# Altium PCB BARRA_SEC_SECUNDARIA.PcbDoc
Units mm, origin at the board's own origin, x right, y up, seen from the top; angles counter-clockwise.
Board outline 195.08 x 54.85 mm, 2 copper layers (Top Layer, Bottom Layer); 8 components, 9 nets, 28 pads, 0 vias.
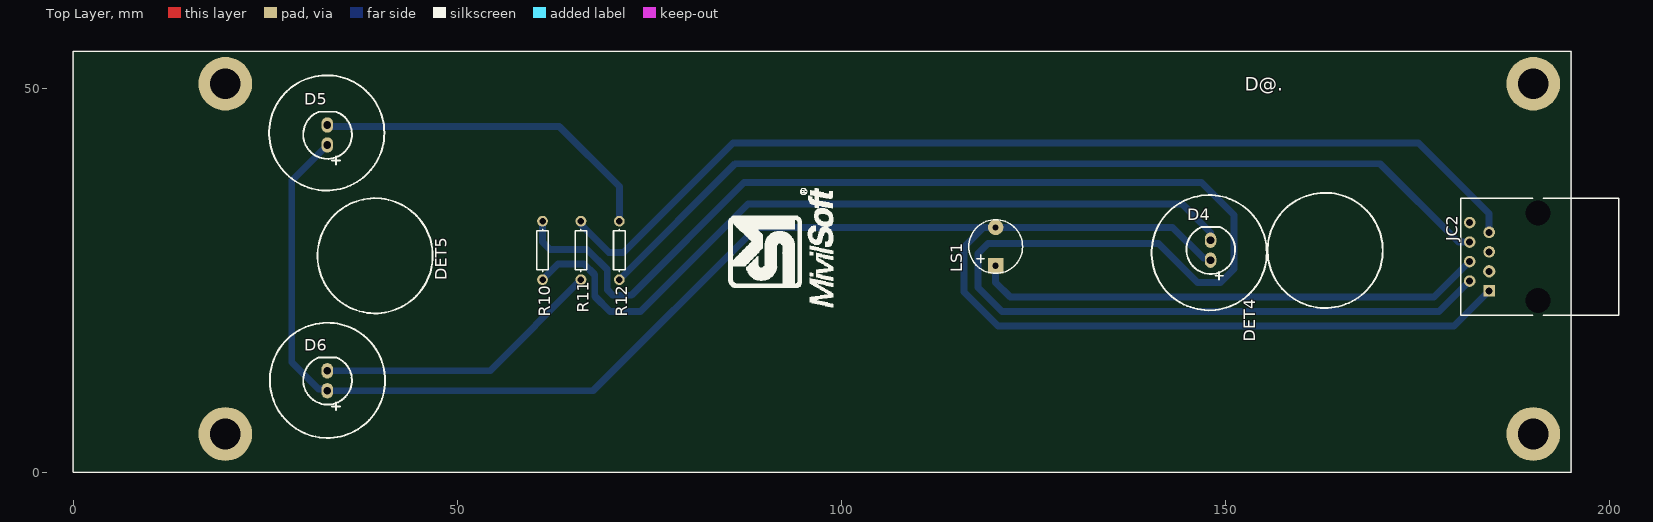
[diagram p0: Top Layer view]
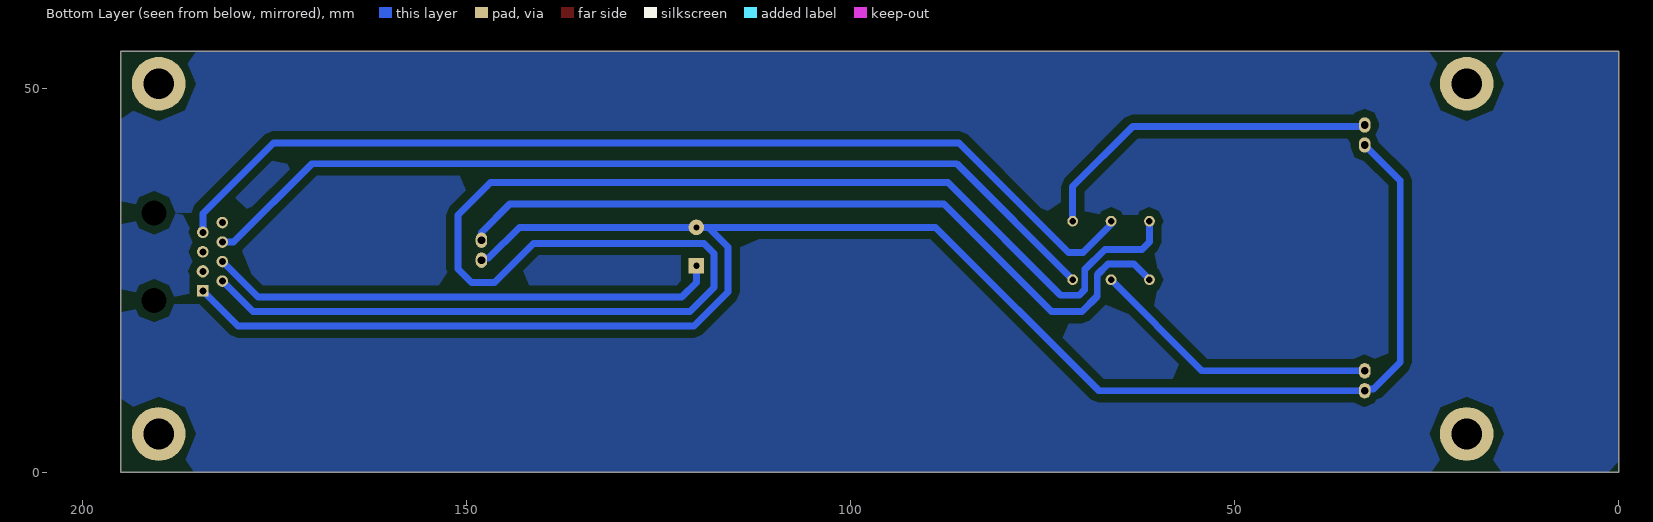
[diagram p1: Bottom Layer view, seen from below]

## Layer stack, top to bottom
Top Solder: solder mask 0.0102, Solder Resist, Dk 3.5
Top Layer: signal copper 0.0356
Dielectric 1: dielectric 0.32, FR-4, Dk 4.8
Bottom Layer: signal copper 0.0356
Bottom Solder: solder mask 0.0102, Solder Resist, Dk 3.5

## Board outline
0,0 195.075,0 195.075,54.846 0,54.846 0,25.896

## Design rules (kind name [scope] priority, off if disabled: settings)
Clearance "POLIGONO GND BOTTON" [(InNamedPolygon('GND BOTTON'))] p1: gap=1
Clearance [All] p2: gap=0.3
PolygonConnect [All] p1: connectstyle=Relief reliefconductorwidth=0.254 reliefentries=4 polygonreliefangle="90 Angle" airgapwidth=0.254
RoomDefinition barra_sec_secundaria [InComponentClass('barra_sec_secundaria')] p1: confinementstyle=ConfineIn formatcopy=TRUE lockcomponents=FALSE outline 0.225,25.975 11.578,25.975 11.578,0.046 195.125,0.046 195.125,54.896 0.225,54.896
RoutingLayers [All] p1: top layer_v5=FALSE bottom layer_v5=TRUE
RoutingVias [All] p1: holewidth=0.711 width=1.27 viastyle="Through Hole" minholewidth=0.711 minwidth=1.27 maxholewidth=0.711 maxwidth=1.27
SolderMaskExpansion [All] p1: expansion=0.102
Width [All] p1: maxlimit=1.5 minlimit=0.8 preferedwidth=0.9
28 further rules are at their usual default settings.

## Components (designator, comment, footprint, x,y, rotation, side; value= is the part's Value field where it differs from the comment)
D4 "LED1" "LED5MM RED" 148.125,28.896 r90 top
D5 "LED1" "LED5MM RED" 33.125,43.896 r90 top
D6 "LED1" "LED5MM RED" 33.125,11.896 r90 top
JC2 "RJ45" 15-43-6233 201.275,28.075 r90 top
LS1 "Speaker" C100UFA 120.125,26.896 r90 top
R10 "Res" AXIAL-0.3 61.125,28.896 r90 top
R11 "Res" AXIAL-0.3 66.125,28.896 r90 top
R12 "Res" AXIAL-0.3 71.125,28.896 r270 top

## Footprints (in the part's own frame and the unit in brackets; to place one, negate y for a bottom-side part, rotate by r counter-clockwise, add the part's x,y. Pads: shape width x height; smd on the part's side, far side on the other; paste and mask are expansions set on the pad)
15-43-6233 [mm] "Connector; PCB Jack, Thru-Hole; 1-Port; Unshielded without Lightpipes; Right Angle"
  rect 1.5x1.5 hole 0.9: 1(-4.445,16.89)
  round 1.5 hole 0.9: 2(-3.175,19.43) 4(-0.635,19.43) 5(0.635,16.89) 6(1.905,19.43) 7(3.175,16.89) 8(4.445,19.43)
  round 1.6 hole 0.9: 3(-1.905,16.89)
  round 2.95 hole 3.25 unplated: MH1(-5.715,10.54) MH2(5.715,10.54)
  silkscreen extent -7.62,0 7.62,20.58
AXIAL-0.3 [mm] "Axial Device, Thru-Hole; 2 Leads; 0.3 in Pin Spacing"
  round 1.4 hole 0.85: 1(-3.81,0) 2(3.81,0)
  silkscreen extent -2.77,-0.76 2.77,0.76
C100UFA [mm]
  rect 2x2 hole 0.8: 1(0,0)
  round 2 hole 0.8: 2(5,0)
  silkscreen extent -1,-3.5 6,3.5
"LED5MM RED" [mm] "Led de 5mm rojo"
  oval 2x1.5 hole 1.016: 1(-1.275,0.025) 2(1.325,0.025)
  silkscreen extent -3.81,-3.18 3.05,3.16, body extent -2.89,-2.88 2.54,3.14, height 12.31

## Part data
D4 D5 D6: "Typical RED GaAs LED"
JC2: library part 15-43-6233, "Right Angle, Standard Profile, RJ45-Keyed, Flange Mount PCB Jack"
LS1: "Loudspeaker"
R10 R11 R12: library part Res1, "Resistor"

## Free pads (board coordinates)
  round 7 hole 4: 0(19.825,4.996) 0(19.825,50.596) 0(190.125,4.996) 0(190.125,50.596)

## Nets (pads, with @x,y where several pads share a name; then routed paths per layer and width w, separated by ;. In a path a pad name is that pad's centre, name@x,y a point inside that pad or via, vN(x,y) a via of type N, cw(c..) or ccw(c..) an arc to the next point about the centre after c; other vN are vias at no path point)
5VCC: D4.1 D5.1 D6.1 JC2.1 LS1.2 | length 245.2
  Bottom Layer w0.9: D6.1 67.721,10.621 88.995,31.896 LS1.2 ; D6.1@33.1,10.861 31.939,10.861 28.475,14.325 28.475,37.995 D5.1 ; D4.1 148.1,27.879 147.173,27.879 143.157,31.896 LS1.2 ; JC2.1 179.78,19.025 120.45,19.025 115.975,23.5 115.975,29.325 118.546,31.896 LS1.2
BUZZER_OUT: JC2.4 LS1.1 | length 66.6
  Bottom Layer w0.9: LS1.1 120.125,24.7 122.025,22.8 177.205,22.8 JC2.4
D4: JC2.2 R10.2 | length 220.2
  Bottom Layer w0.9: R10.2 61.125,29.975 62.075,29.025 66.925,29.025 69.55,26.4 69.55,23.825 70.325,23.05 72.675,23.05 87.375,37.75 146.925,37.75 151.175,33.5 151.175,26.475 149.4,24.7 146.4,24.7 141.3,29.8 119.1,29.8 117.8,28.5 117.8,24.075 120.95,20.925 177.87,20.925 JC2.2
D5: JC2.6 R12.2 | length 121.2
  Bottom Layer w0.9: R12.2 86.215,40.175 170.175,40.175 180.37,29.98 JC2.6
D6: JC2.7 R11.2 | length 132.4
  Bottom Layer w0.9: R11.2 66.125,32.25 69.75,28.625 71.65,28.625 85.925,42.9 175.2,42.9 184.385,33.715 JC2.7
GND: JC2.8
NetD4_2: D4.2 R10.1 | length 100.4
  Bottom Layer w0.9: R10.1 63.165,27.125 66.525,27.125 67.925,25.725 67.925,22.925 69.925,20.925 73.9,20.925 87.9,34.925 144.42,34.925 148.1,31.245 D4.2
NetD5_2: D5.2 R12.1 | length 46
  Bottom Layer w0.9: D5.2 33.1,45.024 63.301,45.024 71.125,37.2 R12.1
NetD6_2: D6.2 R11.1 | length 37.9
  Bottom Layer w0.9: D6.2 54.26,13.221 R11.1
pads on no net: JC2.3 JC2.5 JC2.MH1 JC2.MH2

## Polygon pours and split planes (outlines as drawn)
GND on Bottom Layer "GND BOTTON" (solid, pour order 3): 0,54.846 195.075,54.846 195.075,0 0,0

## Silkscreen, mask and mechanical layers (free items; w line width, h text height)
Top Overlay:
  drawing of 868 lines, arcs and shapes, not listed
  text "D@." at 152.575,49.125 h3
  text "DET5" at 48.625,24.996 h1.52 r90
  text "DET4" at 153.925,16.996 h1.52 r90
Mechanical 1:
  lines w0.254: 196.617,1.42 197.125,-0.104 ; 196.617,53.372 197.125,54.896 ; 196.871,-0.104 197.379,-0.104 ; 196.871,54.896 197.379,54.896 ; 197.125,22.292 197.125,-0.104 ; 197.125,32.499 197.125,54.896 ; 197.633,1.42 197.125,-0.104 ; 197.633,53.372 197.125,54.896
  text "55 (mm)" at 198.039,22.546 h1.52 r90